# Altium PCB fullflex-3.PcbDoc
Units mil, origin at the board's own origin, x right, y up, seen from the top; angles counter-clockwise.
Board outline 6000 x 4000 mil, 2 copper layers (Top Layer, Bottom Layer); 52 components, 23 nets, 165 pads, 0 vias.
Unrouted connection lines stored in the file: 111.
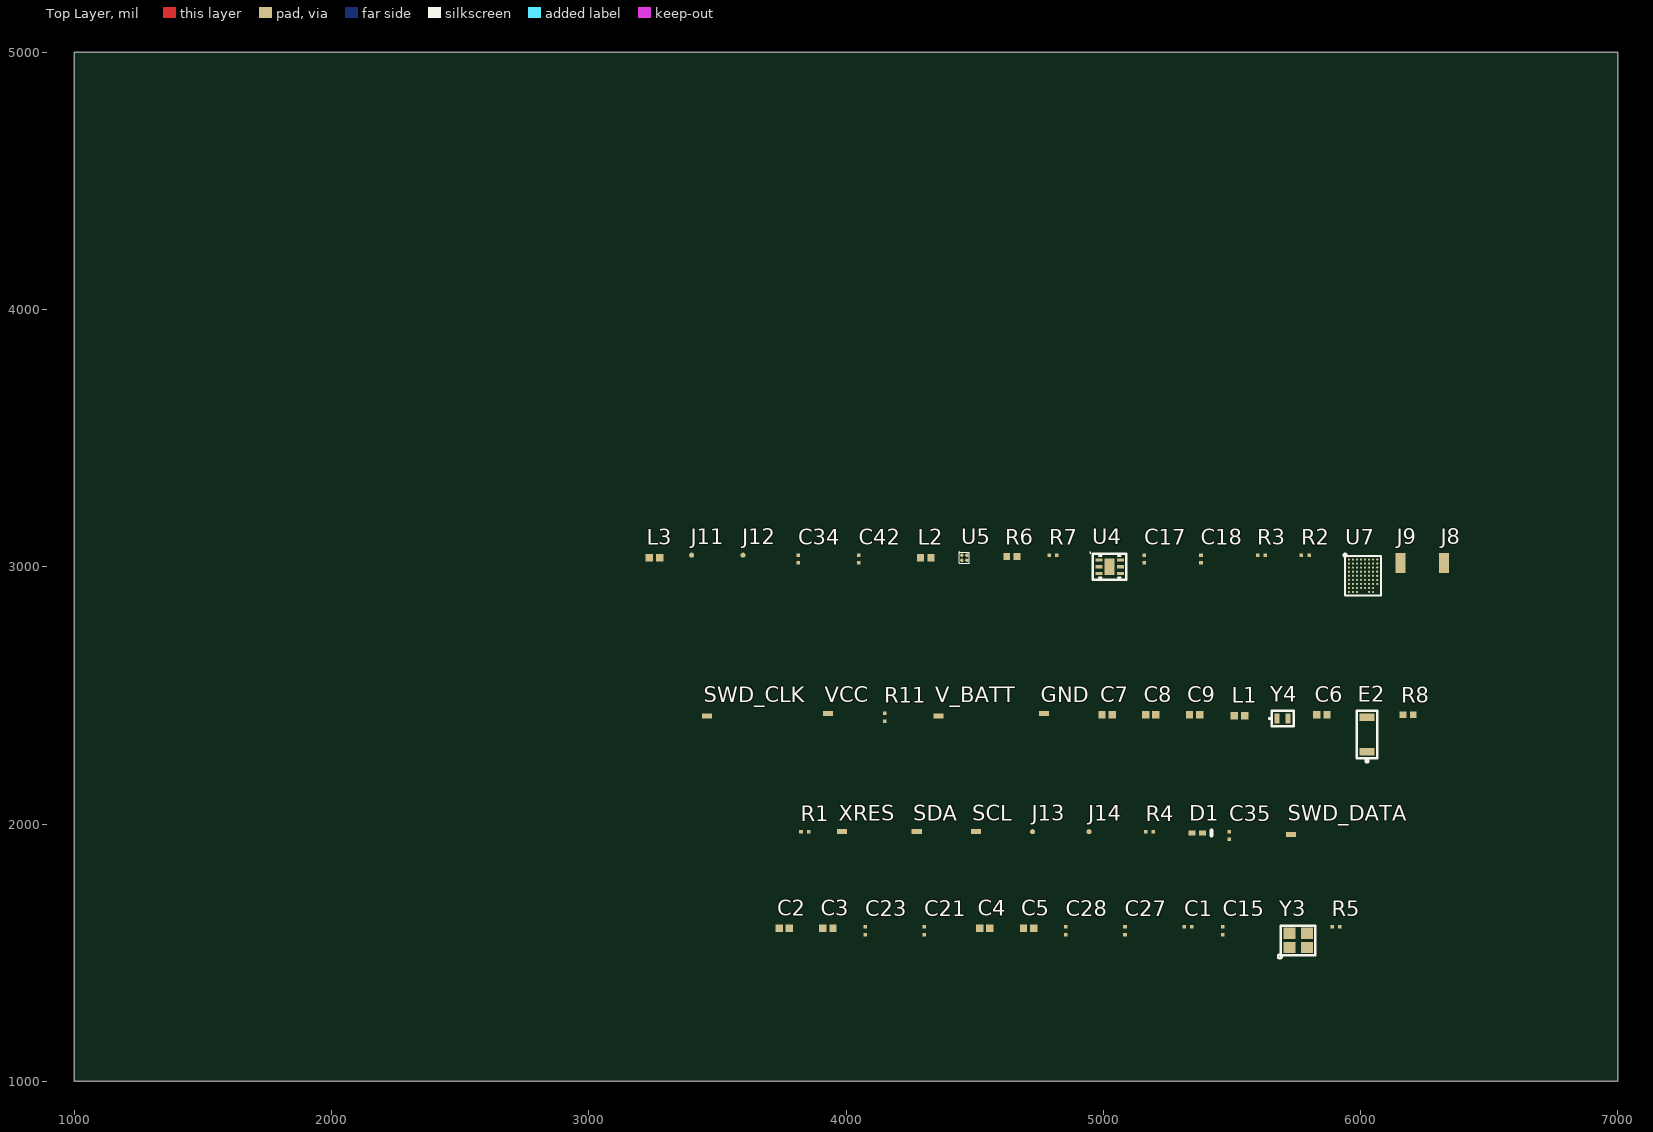
[diagram p0: Top Layer view]
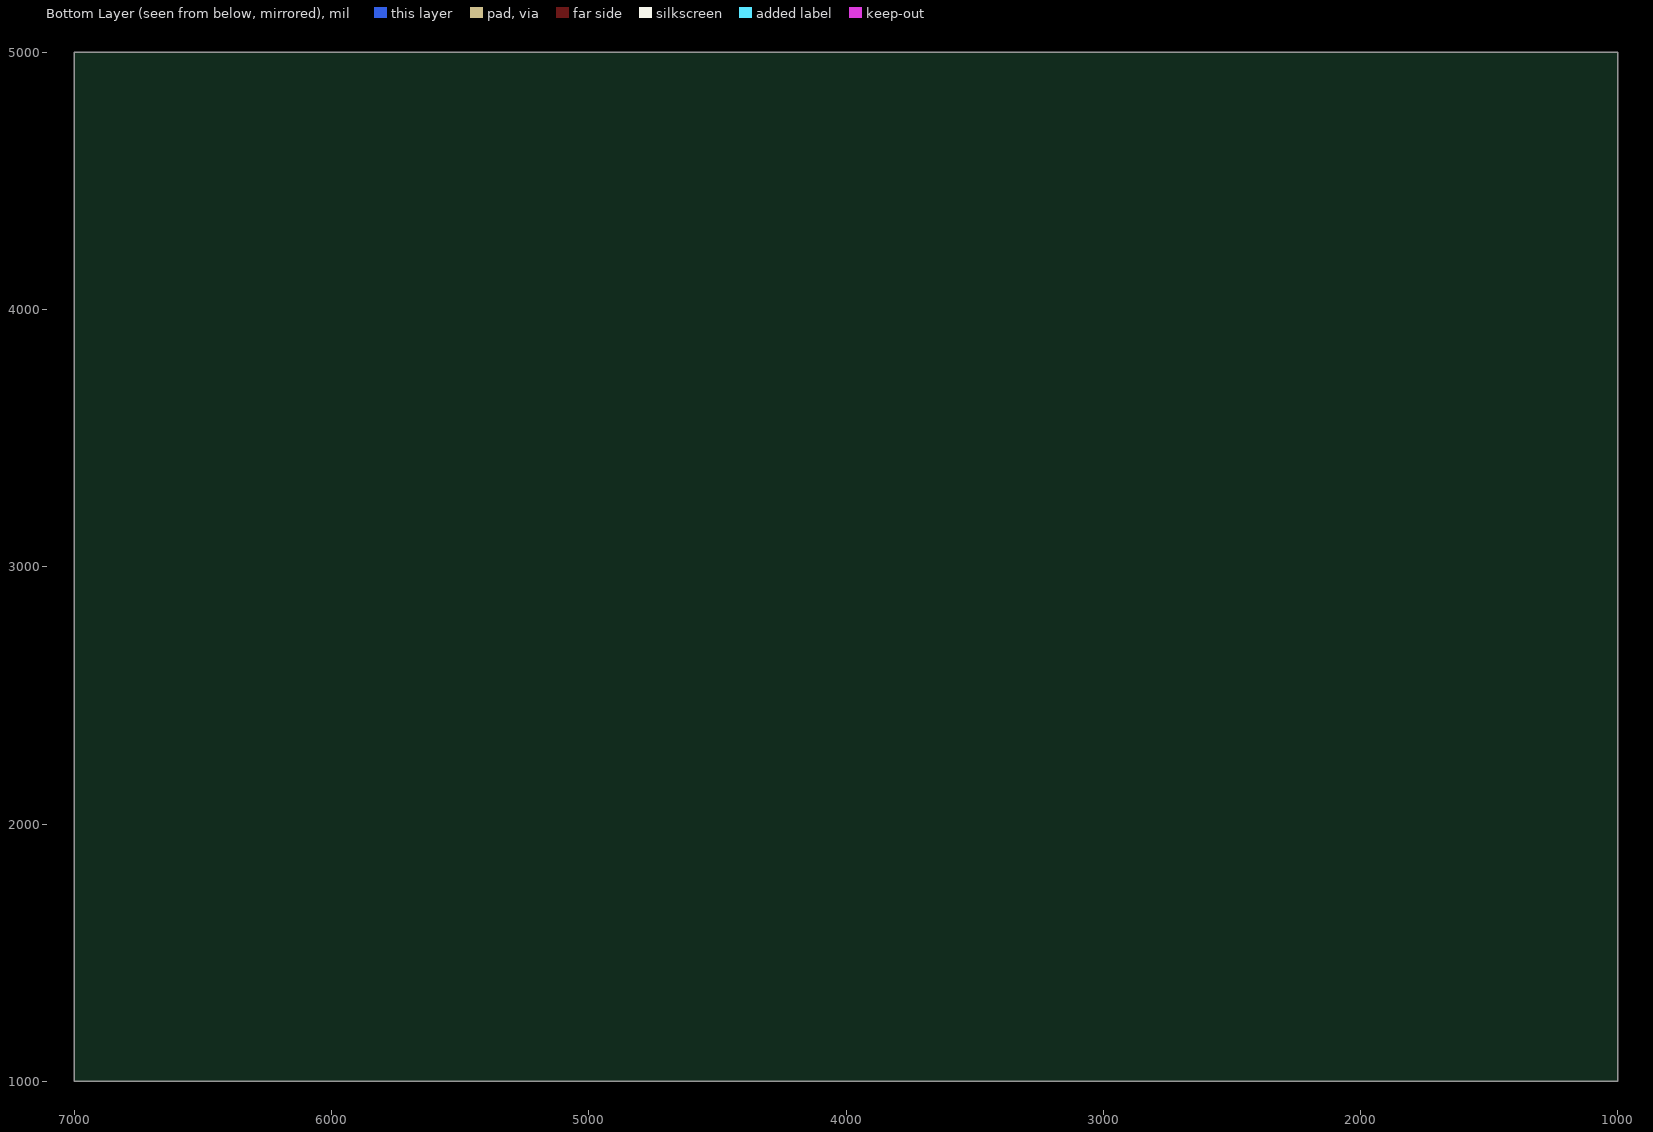
[diagram p1: Bottom Layer view, seen from below]

## Layer stack, top to bottom
Top Solder: solder mask 0.4, Solder Resist, Dk 3.5
Top Layer: signal copper 1.4
Dielectric 1: dielectric 12.6, FR-4, Dk 4.8
Bottom Layer: signal copper 1.4
Bottom Solder: solder mask 0.4, Solder Resist, Dk 3.5

## Board outline
1000,1000 7000,1000 7000,5000 1000,5000

## Design rules (kind name [scope] priority, off if disabled: settings)
Clearance [All] p1: gap=10 ignorepadtopadclearanceinfootprint=FALSE except(0: Arc-Hole Track-Hole SMDPad-Hole THPad-Hole Via-Hole Fill-Hole Poly-Hole Region-Hole Text-Hole)
DiffPairsRouting [All] p1: maxlimit=10 minlimit=10 mostfreqgap=10 toplayer_minwidth=15 toplayer_maxwidth=15 toplayer_prefwidth=15 bottomlayer_minwidth=15 bottomlayer_maxwidth=15 bottomlayer_prefwidth=15 maxuncoupledlength=500
PolygonConnect [All] p1: connectstyle=Relief reliefconductorwidth=10 reliefentries=4 polygonreliefangle="90 Angle" airgapwidth=10
RoutingVias [All] p1: holewidth=28 width=50 viastyle="Through Hole" minholewidth=28 minwidth=50 maxholewidth=28 maxwidth=50
SolderMaskExpansion [All] p1: expansion=4
Width [All] p1: maxlimit=10 minlimit=10 preferedwidth=10
29 further rules are at their usual default settings.

## Classes and differential pairs
differential pair XTAL_LF: +XTAL_LF_P -XTAL_LF_N
differential pair XTAL_HF: +XTAL_HF_P -XTAL_HF_N

## Components (designator, comment, footprint, x,y, rotation, side; value= is the part's Value field where it differs from the comment)
C1 "Capacitance" CAP_0201(0603)_M 5329.69,1600 r0 top
C2 "Capacitance" CAP_0402(1005)_M 3759.68,1595 r0 top
C3 "Capacitance" CAP_0402(1005)_M 3929.68,1595 r0 top
C4 "Capacitance" CAP_0402(1005)_M 4539.69,1595 r0 top
C5 "Capacitance" CAP_0402(1005)_M 4709.69,1595 r0 top
C6 "Capacitance" CAP_0402(1005)_M 5850,2425 r0 top
C7 "Capacitance" CAP_0402(1005)_M 5015,2425 r0 top
C8 "Capacitance" CAP_0402(1005)_M 5185,2425 r0 top
C9 "Capacitance" CAP_0402(1005)_M 5355,2425 r0 top
C15 "Capacitance" CAP_0201(0603)_M 5464.69,1585 r90 top
C17 "Capacitance" CAP_0201(0603)_M 5160,3030 r90 top
C18 "Capacitance" CAP_0201(0603)_M 5380,3030 r90 top
C21 "Capacitance" CAP_0201(0603)_M 4304.69,1585 r90 top
C23 "Capacitance" CAP_0201(0603)_M 4074.68,1585 r90 top
C27 "Capacitance" CAP_0201(0603)_M 5084.69,1585 r90 top
C28 "Capacitance" CAP_0201(0603)_M 4854.69,1585 r90 top
C34 "Capacitance" CAP_0201(0603)_M 3815,3030 r90 top
C35 "Capacitance" CAP_0201(0603)_M 5490,1955 r90 top
C42 "Capacitance" CAP_0201(0603)_M 4050,3030 r90 top
D1 "#NAME?" LED_0402(1005) 5365,1965 r0 top
E2 "2450AT18B100" 2450AT18B100 6025,2280 r90 top
GND "*" Pogo-Pin-Pad 4770,2430 r90 top
J8 "*" Battery_PAD 6325,3015 r0 top
J9 "*" Battery_PAD 6155,3015 r0 top
J11 "*" Pogo-CLOCK-PAD 3400,3045 r90 top
J12 "*" Pogo-CLOCK-PAD 3600,3045 r90 top
J13 "*" Pogo-CLOCK-PAD 4725,1970 r90 top
J14 "*" Pogo-CLOCK-PAD 4945,1970 r90 top
L1 "Inductance" IND_0402(1005)_M 5530,2420 r0 top
L2 "Inductance" IND_0402(1005)_M 4310,3035 r0 top
L3 "Inductance" IND_0402(1005)_M 3255,3035 r0 top
R1 "Resistance" RES_0201(0603)_M 3840,1970 r0 top
R2 "Resistance" RES_0201(0603)_M 5785,3045 r0 top
R3 "Resistance" RES_0201(0603)_M 5615,3045 r0 top
R4 "Resistance" RES_0201(0603)_M 5180,1970 r0 top
R5 "Resistance" RES_0201(0603)_M 5904.69,1600 r0 top
R6 "Resistance" RES_0402(1005)_M 4645,3040 r0 top
R7 "Resistance" RES_0201(0603)_M 4805,3045 r0 top
R8 "Resistance" RES_0402(1005)_M 6185,2425 r0 top
R11 "Resistance" RES_0201(0603)_M 4150,2415 r90 top
SCL "*" Pogo-Pin-Pad 4505,1970 r90 top
SDA "*" Pogo-Pin-Pad 4275,1970 r90 top
SWD_CLK "*" Pogo-Pin-Pad 3460,2420 r90 top
SWD_DATA "*" Pogo-Pin-Pad 5730,1960 r90 top
U4 "*" WSON-6 5025,3000 r0 top
U5 "ADP172" ADP172 4460,3035 r0 top
U7 "*" WLCSP-68 6010,2965 r0 top
V_BATT "*" Pogo-Pin-Pad 4360,2420 r90 top
VCC "*" Pogo-Pin-Pad 3930,2430 r90 top
XRES "*" Pogo-Pin-Pad 3985,1970 r90 top
Y3 "ECX-2236" ECX-2236 5724.69,1520 r0 top
Y4 "32.768KHz" ABS05 5675,2410 r0 top

## Footprints (in the part's own frame and the unit in brackets; to place one, negate y for a bottom-side part, rotate by r counter-clockwise, add the part's x,y. Pads: shape width x height; smd on the part's side, far side on the other; paste and mask are expansions set on the pad)
2450AT18B100 [mm] "2.4GHz Mini Antenna SMD, 50 ohm Resistence"
  rect 0.74x1.5 smd mask+0.03: 1(0,0) 2(3.406,0)
  silkscreen extent -1.02,-1.02 4.06,1.02, body extent -0.05,-0.9 3.35,0.9, height 1.4
ABS05 [mm] "32.768 kHz CRYSTAL 12.5 PF +/-20ppm"
  rect 0.5x1 smd mask+0.1: 1(0,0) 2(1.102,0)
  silkscreen extent -0.76,-0.76 1.65,0.76, body extent -0.25,-0.5 1.35,0.5, height 0.5
ADP172 [mm] "4-Ball WLCSP, CB-4-4"
  round 0.34 smd paste+0.01 mask+0.01: A1(-0.25,0.25) A2(0.25,0.25) B1(-0.25,-0.25) B2(0.25,-0.25)
  silkscreen extent -0.55,-0.53 0.5,0.57, body extent -0.48,-0.48 0.48,0.48, height 0.69
Battery_PAD [mm]
  rect 1x2 smd: 1(0,0)
CAP_0201(0603)_M [mm] "Chip Capacitor, Body 0.6x0.3mm, Height 0.33mm, IPC Low Density"
  rect 0.35x0.35 smd mask+0: 1(-0.381,0) 2(0.381,0)
  body extent -0.31,-0.17 0.32,0.16, height 0.33
CAP_0402(1005)_M [mm] "Chip Capacitor, Body 1.0x0.5mm, Height 0.6mm, IPC Low Density"
  rect 0.72x0.72 smd: 1(-0.5,0) 2(0.5,0)
  body extent -0.55,-0.3 0.55,0.3, height 0.6
ECX-2236 [mm] "48 MHz CRYSTAL 2.5X2.0mm"
  rect 1.2x1.1 smd mask+0.05: 1(0,0) 2(1.7,0) 4(0,1.4)
  rect 1.2x1.1 smd paste+0 mask+0.05: 3(1.7,1.4)
  silkscreen extent -1.14,-1.07 2.54,2.16, body extent -0.36,-0.24 2.14,1.76, height 0.8
IND_0402(1005)_M [mm] "Chip Inductor, 2-Leads, Body 1.1x0.6mm, IPC Low Density"
  rect 0.73x0.74 smd: 1(-0.515,0) 2(0.515,0)
  body extent -0.55,-0.3 0.55,0.3, height 0.45
LED_0402(1005) [mm] "SMD, 2-Leads, Body 1x0.5mm"
  rect 0.7x0.5 smd: A(-0.508,0) K(0.55,0)
  silkscreen extent 1.4,-0.25 1.4,0.25, body extent -0.5,-0.25 0.5,0.25, height 0.6
Pogo-CLOCK-PAD [mm]
  round 0.5 smd: 1(0,0)
Pogo-Pin-Pad [mm]
  rect 0.5x1 smd: 1(0,0)
  body extent -0.16,-0.31 0.17,0.32, height 0.33
RES_0201(0603)_M [mm] "Chip Resistor, Body 0.6x0.3mm, IPC Low Density"
  rect 0.35x0.35 smd mask-0.05: 1(-0.381,0)
  rect 0.35x0.35 smd mask-0.5: 2(0.381,0)
  body extent -0.31,-0.16 0.31,0.16, height 0.3
RES_0402(1005)_M [mm] "Chip Resistor, 2-Leads, Body 1.05x0.55mm, IPC Low Density"
  rect 0.65x0.65 smd: 1(-0.5,0) 2(0.5,0)
  body extent -0.53,-0.28 0.53,0.28, height 0.4
WLCSP-68 [mm] "PSOC 4 BLE CY8C4247FNI-BL483 N40P8X9_352X391X55"
  round 0.21 smd mask+0: A1(-1.4,1.6) A2(-1,1.6) A3(-0.6,1.6) A4(-0.2,1.6) A5(0.2,1.6) A6(0.6,1.6) A7(1,1.6) A8(1.4,1.6) B1(-1.4,1.2) B2(-1,1.2) B3(-0.6,1.2) B4(-0.2,1.2) B5(0.2,1.2) B6(0.6,1.2) B7(1,1.2) B8(1.4,1.2) C1(-1.4,0.8) C2(-1,0.8) C3(-0.6,0.8) C5(0.2,0.8) C6(0.6,0.8) C7(1,0.8) C8(1.4,0.8) D1(-1.4,0.4) D2(-1,0.4) D3(-0.6,0.4) D4(-0.2,0.4) D5(0.2,0.4) D6(0.6,0.4) D7(1,0.4) D8(1.4,0.4) E1(-1.4,0) E2(-1,0) E3(-0.6,0) E4(-0.2,0) E5(0.2,0) E6(0.6,0) E7(1,0) E8(1.4,0) F1(-1.4,-0.4) F2(-1,-0.4) F3(-0.6,-0.4) F4(-0.2,-0.4) F5(0.2,-0.4) F6(0.6,-0.4) F7(1,-0.4) F8(1.4,-0.4) G1(-1.4,-0.8) G2(-1,-0.8) G3(-0.6,-0.8) G4(-0.2,-0.8) G5(0.2,-0.8) G6(0.6,-0.8) G7(1,-0.8) G8(1.4,-0.8) H1(-1.4,-1.2) H2(-1,-1.2) H3(-0.6,-1.2) H4(-0.2,-1.2) H5(0.2,-1.2) H6(0.6,-1.2) H7(1,-1.2) J1(-1.4,-1.6) J2(-1,-1.6) J3(-0.6,-1.6) J6(0.6,-1.6) J7(1,-1.6)
  round 0.21 smd mask-0.05: C4(-0.2,0.8)
  silkscreen extent -1.9,-1.97 1.77,2.16, body extent -1.77,-1.97 1.77,1.97, height 0.55
WSON-6 [mm] "SON, 6-Leads, Body 2x2mm, Pitch 0.65mm, Thermal Pad 1X1.6mm"
  rect 0.7x0.3 smd: 1(-1.05,0.65) 2(-1.05,0) 3(-1.05,-0.65) 4(1.05,-0.65) 5(1.05,0) 6(1.05,0.65)
  rect 1x1.6 smd: 7(0,0)
  silkscreen extent -1.95,-1.27 1.65,1.45, body extent -1,-1 1,1, height 0.8

## Part data
C1 C15 C17 C18 C21 C23 C27 C28 C34 C35 C42: library part C-0201(0603), "___ OHM ___ mW 0201(0603) SMD"
C2 C3 C4 C5 C6 C7 C8 C9: library part C-0402(1005), "___ OHM ___ mW 0402(1005) SMD"
D1: library part LED_0402(1005), "LED, 0402(1005) SMD"
E2: "2.4 GHz BLE Antenna", Case/Package=CSMD, Frequency=2.45GHz, Manufacturer=Johanson, Manufacturer Part Number=2450AT18B100E, Max Frequency=2.5GHz, Max Power Dissipation=3W, Package Quantity=1, Supplier Part Number 1=712-1006-1-ND, Bandwidth=100MHz, ComponentLink1Description=https://datasheet.ciiva.com/1124/1318299-1124918.pdf, ComponentLink1URL=https://datasheet.ciiva.com/1124/1318299-1124918.pdf, ComponentLink2Description=https://datasheet.ciiva.com/24025/antenna-2450at18b100-242422-24025839.pdf, ComponentLink2URL=https://datasheet.ciiva.com/24025/antenna-2450at18b100-242422-24025839.pdf, Contact Plating=Tin, Description 1="JOHANSON TECHNOLOGY         2450AT18B100E             ANTENNA, CERAMIC, 2.45GHZ", Gain=-0.5dB, Height=0.051inch, Impedance=50R, Length=3.2mm, Mount="Surface Mount", Number of Bands=1, Packaging="Tape and Reel", Power Rating=3W, Pricing 1="1=0.62, 10=0.541, 25=0.4788, 100=0.4172, 250=0.3631, 500=0.309, 1000=0.2472 (USD)", REACH SVHC="No SVHC", Return Loss=-9.5dB, Stock 1=187598, Supplier 1=Digi-Key, Termination=Solder, Width=1.6mm
GND SCL SDA SWD_CLK SWD_DATA V_BATT VCC XRES: library part "Probe-Pin Pad"
J8 J9: library part Battery_Connector
J11 J12 J13 J14: library part Probe-CLOCK
L1 L3: library part I-0402(1005)
L2: library part "Inductor Iron", "Magnetic-Core Inductor"
R1 R2 R3 R4 R5 R7 R11: library part R-0201(0603), "___ OHM ___ mW 0201(0603) SMD"
R6 R8: library part R-0402(1005), "___ OHM ___ mW 0402(1005) SMD"
U4: library part TMP116, "TI Digital I2C Temperature Sensor", Manufacturer="Texas Instruments", Manufacturer Part Number=TMP116AIDRVT, Max Operating Temperature=150°C, Min Operating Temperature=-55°C, Supplier Part Number 1=296-46944-1-ND, Interface=I2C,SMBus,2-Wire, Pricing 1="1=4.01, 10=3.599, 100=2.9485 (USD)", Stock 1=995, Supplier 1=Digi-Key
U5: "3V LDO", Dropout Voltage=50mV, Manufacturer="Analog Devices", Manufacturer Part Number=ADP172ACBZ-3.0-R7, Max Input Voltage=3.6V, Max Operating Temperature=125°C, Max Output Current=300mA, Max Output Voltage=3V, Max Supply Current=170uA, Min Current Limit=400mA, Min Input Voltage=1.6V, Min Operating Temperature=-40°C, Min Output Voltage=800mV, Nominal Supply Current=23uA, Package Quantity=3000, Power Supply Rejection Ratio (PSRR)=73dB, Quiescent Current=60uA, Supplier Part Number 1=ADP172ACBZ-3.0-R7CT-ND, ComponentLink1Description=https://datasheet.ciiva.com/2056/adp172-2056690.pdf, ComponentLink1URL=https://datasheet.ciiva.com/2056/adp172-2056690.pdf, ComponentLink2Description=https://datasheet.ciiva.com/2056/adp172-2056691.pdf, ComponentLink2URL=https://datasheet.ciiva.com/2056/adp172-2056691.pdf, ComponentLink3Description=https://datasheet.ciiva.com/2056/adp172-2056692.pdf, ComponentLink3URL=https://datasheet.ciiva.com/2056/adp172-2056692.pdf, ComponentLink4Description=https://datasheet.ciiva.com/3224/adp172-3224693.pdf, ComponentLink4URL=https://datasheet.ciiva.com/3224/adp172-3224693.pdf, ComponentLink5Description=https://datasheet.ciiva.com/17365/adp172-17365245.pdf, ComponentLink5URL=https://datasheet.ciiva.com/17365/adp172-17365245.pdf, ComponentLink6Description=https://datasheet.ciiva.com/48694/001251525-da-01-en-ic-reg-ldo-adp172acbz-3-0-r7-wlcsp-4-adi-48694412.pdf, ComponentLink6URL=https://datasheet.ciiva.com/48694/001251525-da-01-en-ic-reg-ldo-adp172acbz-3-0-r7-wlcsp-4-adi-48694412.pdf, Contact Plating=Copper,Tin,Silver, Description 1="Linear Voltage Regulator IC Positive Fixed 1 Output 3V 300mA 4-WLCSP (0.95x1.03)", Lead Free="Contains Lead", Mount="Surface Mount", Number of Outputs=1, Number of Pins=4, Number of Regulators=1, Operating Supply Current=23uA, Output Current=300mA, Output Voltage=3V, Packaging="Tape and Reel", Polarity=Positive, Pricing 1="1=1.13, 10=1.013, 100=0.7896, 500=0.6523, 1000=0.515 (USD)", Radiation Hardening=No, Stock 1=438, Supplier 1=Digi-Key
U7: library part CY8C4127FNI-BL483, "PSOC 4 CYBLE", Frequency=48MHz, Manufacturer=Cypress, Manufacturer Part Number=CY8C4247FNI-BL483T, Max Operating Temperature=85°C, Max Supply Voltage=5.5V, Min Operating Temperature=-40°C, Min Supply Voltage=1.71V, Package Quantity=2000, Supplier Part Number 1=428-4490-ND, ComponentLink1Description=http://www.cypress.com/?docID=50617, ComponentLink1URL=http://www.cypress.com/?docID=50617, ComponentLink2Description=http://www.cypress.com/file/137466/download, ComponentLink2URL=http://www.cypress.com/file/137466/download, Contact Plating=Copper,Tin,Silver, Core Architecture=ARM, Data Bus Width=32b, Interface=I2C,SPI,I2S,IrDA,SSP,UART,USART,LIN, Lead Free="Lead Free", Max Frequency=48MHz, Memory Size=128KB, Memory Type=FLASH, Mount="Surface Mount", Number of I/Os=36, Number of Programmable I/O=36, Number of Timers/Counters=4, Oscillator Type=Internal, Packaging="Tape and Reel", Peripherals="Brown-out Detect/Reset,POR,PWM,WDT,LVD,LCD", Pricing 1="1=7.05, 10=6.345, 25=5.7812, 100=5.217, 250=4.794, 500=4.371, 1000=3.807, 2500=3.666 (USD)", RAM Size=16KB, Stock 1=250, Supplier 1=Digi-Key, Watchdog Timer=Yes
Y3: "24 MHz Crystal", Case/Package=SMD/SMT, ESR (Equivalent Series Resistance)=60R, Frequency=24MHz, Frequency Stability=10ppm, Load Capacitance=8pF, Manufacturer="ECS International", Manufacturer Part Number=ECS-240-8-36CKM-TR, Max Operating Temperature=70°C, Min Operating Temperature=-20°C, Package Quantity=1000, Supplier Part Number 1=XC1557CT-ND, ComponentLink1Description=http://www.ecsxtal.com/store/pdf/partnumber4.pdf, ComponentLink1URL=http://www.ecsxtal.com/store/pdf/partnumber4.pdf, ComponentLink2Description=http://www.mouser.com/ds/2/122/ECX-2236-15751.pdf, ComponentLink2URL=http://www.mouser.com/ds/2/122/ECX-2236-15751.pdf, Description 1="Crystals 24MHz 10ppm", Frequency Tolerance=10ppm, Height=0.026inch, Length=0.098inch, Mount="Surface Mount", Packaging="Tape and Reel", Pricing 1="1=1.12, 10=0.987, 50=0.9224, 100=0.8151, 500=0.7722 (USD)", Stock 1=30313, Supplier 1=Digi-Key, Termination=SMD/SMT, Tolerance=10ppm, Width=0.079inch
Y4: library part ABS05, "Crystal Oscillator", Case/Package=SMD/SMT, ESR (Equivalent Series Resistance)=90kR, Frequency=32.768kHz, Frequency Tolerance=20ppm, Load Capacitance=12.5pF, Manufacturer=Abracon, Manufacturer Part Number=ABS05-32.768KHZ-T, Max Operating Temperature=85°C, Min Operating Temperature=-40°C, Package Quantity=3000, Supplier Part Number 1=535-11899-1-ND, ComponentLink1Description=https://datasheet.ciiva.com/23810/abs05-23810480.pdf, ComponentLink1URL=https://datasheet.ciiva.com/23810/abs05-23810480.pdf, ComponentLink2Description=https://datasheet.ciiva.com/6728/abs05-6728949.pdf, ComponentLink2URL=https://datasheet.ciiva.com/6728/abs05-6728949.pdf, ComponentLink3Description=https://datasheet.ciiva.com/6728/abs05-6728950.pdf, ComponentLink3URL=https://datasheet.ciiva.com/6728/abs05-6728950.pdf, ComponentLink4Description=https://datasheet.ciiva.com/16411/abs05-16411149.pdf, ComponentLink4URL=https://datasheet.ciiva.com/16411/abs05-16411149.pdf, Depth=1mm, Description 1="32.768kHz ±20ppm Crystal 12.5pF 90 kOhm -40°C ~ 85°C  Surface Mount 2-SMD", Height=0.02inch, Lead Free="Lead Free", Length=1.6mm, Mount="Surface Mount", Number of Pins=2, Packaging="Tape and Reel", Pricing 1="1=1.03, 10=0.911, 50=0.8514, 100=0.7524, 500=0.7128, 1000=0.594 (USD)", Radiation Hardening=No, REACH SVHC="No SVHC", Series Resistance=90kR, Stock 1=92285, Supplier 1=Digi-Key, Termination=SMD/SMT, Tolerance=20ppm, Width=0.039inch

## Nets (pads, with @x,y where several pads share a name; then routed paths per layer and width w, separated by ;. In a path a pad name is that pad's centre, name@x,y a point inside that pad or via, vN(x,y) a via of type N, cw(c..) or ccw(c..) an arc to the next point about the centre after c; other vN are vias at no path point)
ALERT: R7.1 U4.3 U7.B1
ANTENNA: R8.1 U7.H7
BATTERY_LEVEL: R4.2 R5.1 U7.A4
GND: C1.2 C2.2 C3.2 C4.2 C5.2 C7.2 C8.2 C9.2 C15.2 C17.2 C18.2 C21.2 C23.2 C27.2 C28.2 C34.2 C35.2 C42.2 GND.1 J9.1 L1.1 R1.2 R5.2 U4.2 U4.4 U4.7 U5.B2 U7.A2 U7.A5 U7.A6 U7.B2 U7.C1 U7.D6 U7.E8 U7.F1 U7.F6 U7.F7 U7.G4 U7.G5 U7.G6 U7.G7 U7.G8 U7.H5 U7.H6 Y3.2 Y3.4
LED_RED: D1.A U7.D1
NetC6_1: C6.1 R8.2
NetC6_2: C6.2 C7.1 L1.2 L3.1
NetC34_1: C34.1 C42.1 L2.1 R6.2 U5.A2
NetD1_K: D1.K R1.1
NetE2_1: E2.1 L3.2
SCL: R3.2 SCL.1 U4.1 U7.H1
SDA: R2.2 SDA.1 U4.6 U7.J1
SWD_CLK: SWD_CLK.1 U7.F2
SWD_DATA: SWD_DATA.1 U7.G1
V_BATT: C4.1 C5.1 C27.1 C28.1 J8.1 R4.1 R6.1 U5.A1 U5.B1 V_BATT.1
VCC: C2.1 C3.1 C17.1 C18.1 C21.1 C23.1 L2.2 R2.1 R3.1 R7.2 R11.1 U4.5 U7.A8 U7.D2 U7.F8 U7.G2 U7.J3 U7.J6 VCC.1
VCCD: C1.1 U7.A7
VREF: C15.1 U7.A1
XRES: C35.1 R11.2 U7.C7 XRES.1
XTAL_HF_N: J14.1 U7.H3 Y3.3
XTAL_HF_P: J13.1 U7.H4 Y3.1
XTAL_LF_N: C9.1 J12.1 U7.B7 Y4.2
XTAL_LF_P: C8.1 J11.1 U7.B8 Y4.1
pads on no net: E2.2 U7.A3 U7.B3 U7.B4 U7.B5 U7.B6 U7.C2 U7.C3 U7.C4 U7.C5 U7.C6 U7.C8 U7.D3 U7.D4 U7.D5 U7.D7 U7.D8 U7.E1 U7.E2 U7.E3 U7.E4 U7.E5 U7.E6 U7.E7 U7.F3 U7.F4 U7.F5 U7.G3 U7.H2 U7.J2 U7.J7